# Altium PCB S52多功能板.PcbDoc (part 4 of 5)
Units mm, origin at the board's own origin, x right, y up, seen from the top; angles counter-clockwise.
Board outline 152.4 x 101.6 mm, 2 copper layers (Top Layer, Bottom Layer); 136 components, 143 nets, 561 pads, 46 vias.
Unrouted connection lines stored in the file: 1.
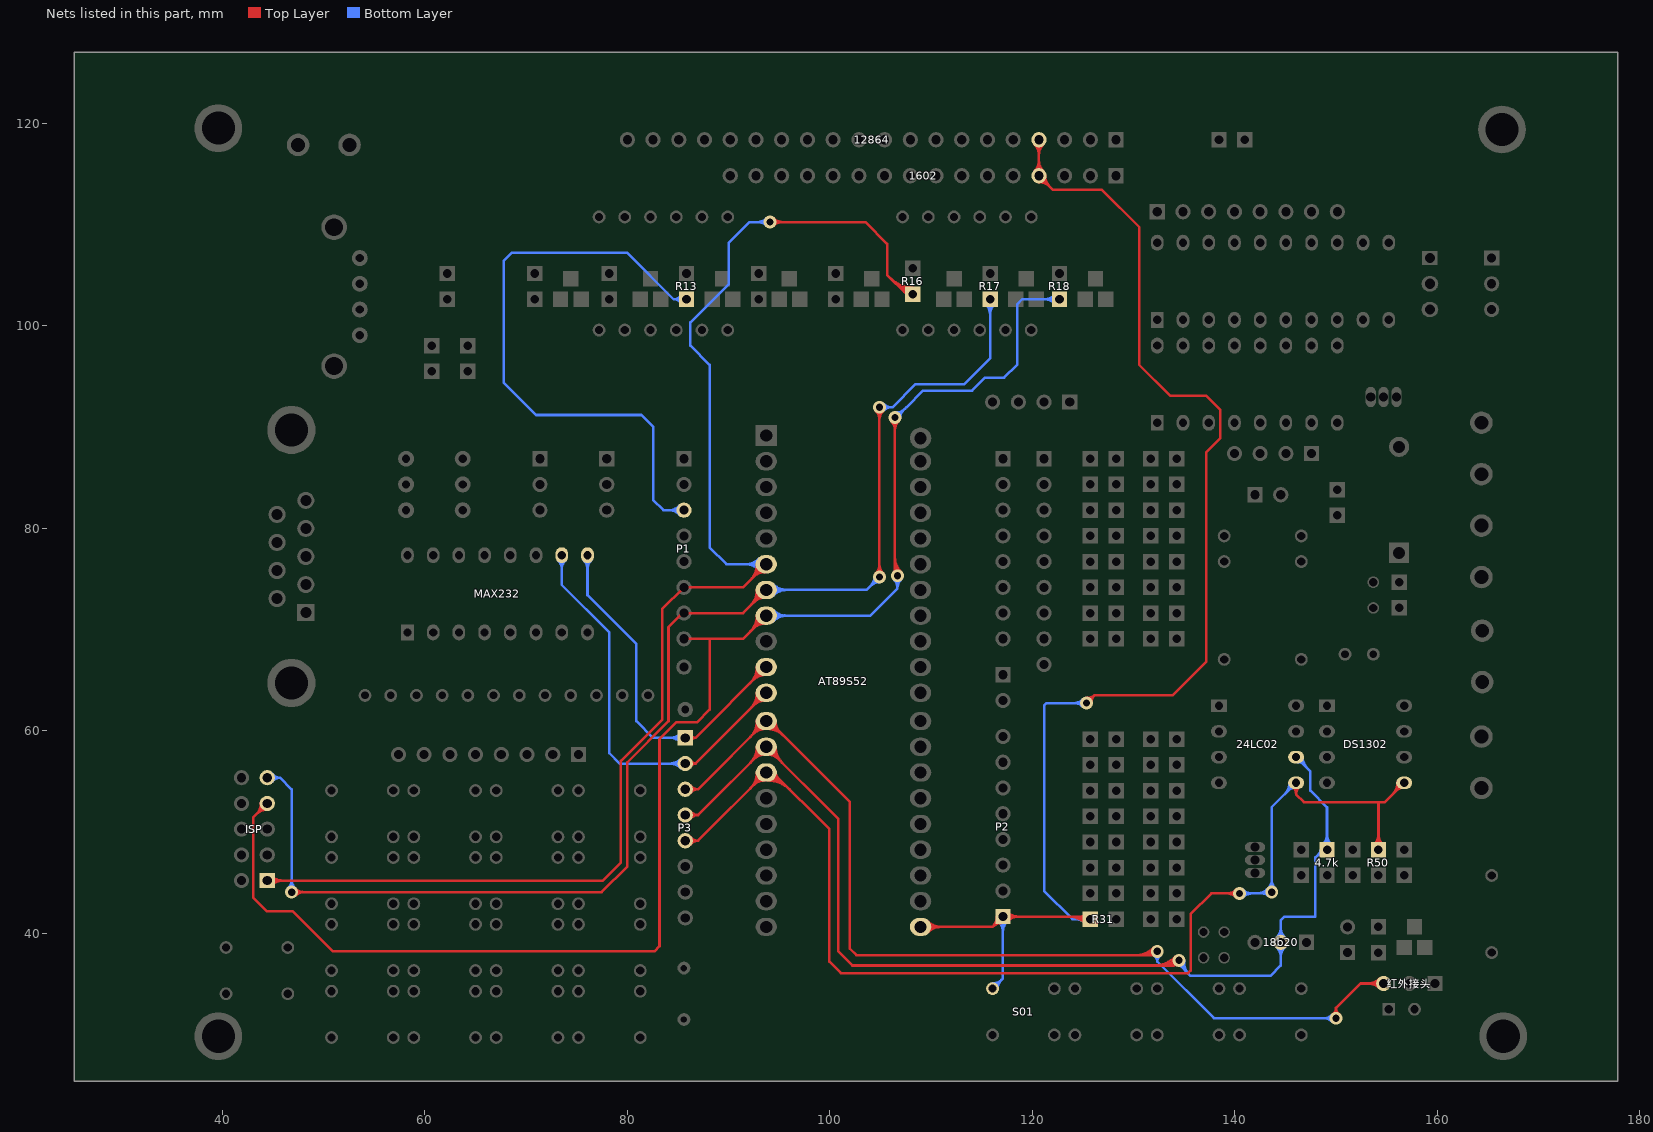
[diagram p4: the nets of this part, all layers, seen from the top]

## Via types
v1: diameter 1.27, hole 0.711, Top Layer to Bottom Layer, 46 vias

## Nets (pads, with @x,y where several pads share a name; then routed paths per layer and width w, separated by ;. In a path a pad name is that pad's centre, name@x,y a point inside that pad or via, vN(x,y) a via of type N, cw(c..) or ccw(c..) an arc to the next point about the centre after c; other vN are vias at no path point) (continued)
P10: AT89S52.1 P1.1 R11.1 | length 55.1
  Top Layer w0.254: P1.1@85.598,86.868 91.437,86.868 AT89S52.1@93.722,89.153 ; P1.1@85.859,86.607 cw(c86.489,85.977) 86.489,86.868 cw(c86.489,87.759) P1.1@85.859,87.129 ; P1.1@86.039,86.427 cw(c87.102,85.364) 87.102,86.868 cw(c87.102,88.372) P1.1@86.039,87.309 ; AT89S52.1@92.797,89.153 cw(c90.563,89.153) 92.142,87.573 cw(c93.722,85.993) AT89S52.1@93.722,88.228 ; AT89S52.1@93.051,89.153 cw(c91.43,89.153) 92.576,88.007 cw(c93.722,86.861) AT89S52.1@93.722,88.482
  Bottom Layer w0.254: R11.1@70.295,102.338 ccw(c69.85,102.121) 69.85,102.616 ; R11.1@70.295,102.894 cw(c69.85,103.111) 69.85,102.616 ; R11.1@70.866,102.616 69.85,102.616 ; P1.1@85.157,87.309 ccw(c84.094,88.372) 85.598,88.372 ccw(c87.102,88.372) P1.1@86.039,87.309 ; P1.1@85.337,87.129 ccw(c84.707,87.759) 85.598,87.759 ccw(c86.489,87.759) P1.1@85.859,87.129 ; P1.1@85.598,86.868 85.598,91.186 83.566,93.218 70.739,93.218 69.215,94.742 69.215,101.981 69.85,102.616
P10: 
P11: AT89S52.2 P1.2 R12.1 | length 73.9
  Top Layer w0.254: P1.2@85.598,84.328 91.437,84.328 AT89S52.2@93.722,86.613 ; P1.2@85.859,84.067 cw(c86.489,83.437) 86.489,84.328 cw(c86.489,85.219) P1.2@85.859,84.589 ; P1.2@86.039,83.887 cw(c87.102,82.824) 87.102,84.328 cw(c87.102,85.832) P1.2@86.039,84.769 ; 92.142,85.033 ccw(c90.563,86.613) AT89S52.2@92.797,86.613 ; 92.505,85.395 cw(c93.572,84.328) AT89S52.2@93.572,85.838 ; 92.576,85.467 ccw(c91.43,86.613) AT89S52.2@93.051,86.613 ; 92.938,85.829 cw(c93.572,85.195) AT89S52.2@93.572,86.092 ; 93.01,85.9 ccw(c92.297,86.613) AT89S52.2@93.305,86.613
  Bottom Layer w0.254: R12.1@77.783,102.167 ccw(c76.699,101.083) 76.699,102.616 ccw(c76.699,104.149) R12.1@77.783,103.065 ; R12.1@77.963,102.347 ccw(c77.312,101.696) 77.312,102.616 ccw(c77.312,103.536) R12.1@77.963,102.885 ; R12.1@78.232,102.616 75.946,102.616 72.009,106.553 69.342,106.553 68.453,105.664 68.453,94.615 70.739,92.329 81.788,92.329 83.439,90.678 83.439,84.709 83.82,84.328 P1.2@85.598,84.328 ; P1.2@85.157,83.887 ccw(c84.094,82.824) 84.094,84.328 ccw(c84.094,85.832) P1.2@85.157,84.769 ; P1.2@85.337,84.067 ccw(c84.707,83.437) 84.707,84.328 ccw(c84.707,85.219) P1.2@85.337,84.589
P11: 
P12: AT89S52.3 | length 14.8
  Top Layer w0.254: 85.598,81.788 91.437,81.788 AT89S52.3@93.722,84.073 ; 92.142,82.493 ccw(c90.563,84.073) AT89S52.3@92.797,84.073 ; 92.505,82.855 cw(c93.572,81.788) AT89S52.3@93.572,83.298 ; 92.576,82.927 ccw(c91.43,84.073) AT89S52.3@93.051,84.073 ; 92.938,83.289 cw(c93.572,82.655) AT89S52.3@93.572,83.552 ; 93.01,83.36 ccw(c92.297,84.073) AT89S52.3@93.305,84.073
P12: P1.3 R13.1 | length 65.1
  Bottom Layer w0.254: P1.3@85.157,81.347 ccw(c84.094,80.284) 84.094,81.788 ccw(c84.094,83.292) P1.3@85.157,82.229 ; P1.3@85.337,81.527 ccw(c84.707,80.897) 84.707,81.788 ccw(c84.707,82.679) P1.3@85.337,82.049 ; R13.1@85.344,102.235 ccw(c84.582,101.664) 84.582,102.616 ; R13.1@85.344,102.997 cw(c84.582,103.568) 84.582,102.616 ; P1.3@85.598,81.788 83.566,81.788 82.55,82.804 82.55,90.043 81.407,91.186 70.993,91.186 67.818,94.361 67.818,106.426 68.58,107.188 80.01,107.188 84.582,102.616 ; R13.1@85.852,102.616 84.582,102.616
P13: AT89S52.4 P1.4 R14.1 | length 104.3
  Top Layer w0.254: P1.4@85.598,79.248 91.437,79.248 AT89S52.4@93.722,81.533 ; P1.4@85.859,78.987 cw(c86.489,78.357) 86.489,79.248 cw(c86.489,80.139) P1.4@85.859,79.509 ; P1.4@86.039,78.807 cw(c87.102,77.744) 87.102,79.248 cw(c87.102,80.752) P1.4@86.039,79.689 ; v1@88.392,107.442 cw(c88.392,104.989) 90.126,106.724 ; v1@88.392,107.696 cw(c88.392,105.856) 89.693,107.157 ; 89.259,107.591 ccw(c88.392,106.724) v1(88.392,107.95) 88.9,107.95 91.44,105.41 91.44,104.267 92.964,102.743 R14.1@92.964,102.616 ; 91.79,103.917 cw(c90.489,102.616) R14.1@92.329,102.616 ; 92.097,103.61 ccw(c92.964,104.477) R14.1@92.964,103.251 ; 92.142,79.953 ccw(c90.563,81.533) AT89S52.4@92.797,81.533 ; 92.224,103.483 cw(c91.357,102.616) R14.1@92.583,102.616 ; 92.505,80.315 cw(c93.572,79.248) AT89S52.4@93.572,80.758 ; 92.576,80.387 ccw(c91.43,81.533) AT89S52.4@93.051,81.533 ; 92.938,80.749 cw(c93.572,80.115) AT89S52.4@93.572,81.012 ; 93.01,80.82 ccw(c92.297,81.533) AT89S52.4@93.305,81.533
  Bottom Layer w0.254: P1.4@85.157,78.807 ccw(c84.094,77.744) 84.094,79.248 ccw(c84.094,80.752) P1.4@85.157,79.689 ; P1.4@85.337,78.987 ccw(c84.707,78.357) 84.707,79.248 ccw(c84.707,80.139) P1.4@85.337,79.509 ; P1.4@85.598,79.248 83.312,79.248 81.788,80.772 81.788,89.027 81.026,89.789 71.247,89.789 67.056,93.98 67.056,106.934 67.945,107.823 v1@88.265,107.823 ; 86.859,107.823 ccw(c86.859,109.483) v1@88.033,108.309 ; v1@88.033,107.591 ccw(c87.472,107.03) 87.472,107.823 ccw(c87.472,108.87) v1@88.212,108.13
P13: 
P14: AT89S52.5 P1.5 R15.1 | length 79.3
  Top Layer w0.254: P1.5@85.598,76.708 91.437,76.708 AT89S52.5@93.722,78.993 ; P1.5@85.859,76.447 cw(c86.489,75.817) 86.489,76.708 cw(c86.489,77.599) P1.5@85.859,76.969 ; P1.5@86.039,76.267 cw(c87.102,75.204) 87.102,76.708 cw(c87.102,78.212) P1.5@86.039,77.149 ; 92.142,77.413 ccw(c90.563,78.993) AT89S52.5@92.797,78.993 ; v1(92.202,108.712) 96.266,108.712 97.536,107.442 97.536,105.664 R15.1@100.584,102.616 ; 92.505,77.775 cw(c93.572,76.708) AT89S52.5@93.572,78.218 ; v1@92.561,108.353 cw(c93.428,107.486) 93.428,108.712 cw(c93.428,109.938) v1@92.561,109.071 ; 92.576,77.847 ccw(c91.43,78.993) AT89S52.5@93.051,78.993 ; 92.938,78.209 cw(c93.572,77.575) AT89S52.5@93.572,78.472 ; 93.01,78.28 ccw(c92.297,78.993) AT89S52.5@93.305,78.993 ; R15.1@99.949,102.616 ccw(c98.416,102.616) 99.5,103.7 ccw(c100.584,104.784) R15.1@100.584,103.251 ; R15.1@100.203,102.616 ccw(c99.283,102.616) 99.934,103.266 ccw(c100.584,103.917) R15.1@100.584,102.997
  Bottom Layer w0.254: 90.96,107.978 cw(c92.123,106.816) v1@92.191,108.458 ; 91.369,108.387 cw(c92.155,107.601) v1(92.202,108.712) 91.694,108.712 90.805,107.823 90.805,103.759 88.646,101.6 88.646,80.264 89.917,78.993 AT89S52.5@93.722,78.993 ; AT89S52.5@93.024,78.445 ccw(c91.7,77.121) 91.7,78.993 ccw(c91.7,80.865) AT89S52.5@93.024,79.541 ; AT89S52.5@93.204,78.624 ccw(c92.313,77.734) 92.313,78.993 ccw(c92.313,80.252) AT89S52.5@93.204,79.362
P14: 
P15: AT89S52.6 ISP.1 R16.1 | length 161.9
  Top Layer w0.254: ISP.1@44.45,45.212 77.597,45.212 79.375,46.99 79.375,57.023 83.439,61.087 83.439,72.009 85.598,74.168 91.437,74.168 AT89S52.6@93.722,76.453 ; ISP.1@44.711,44.951 cw(c45.341,44.321) 45.341,45.212 cw(c45.341,46.103) ISP.1@44.711,45.473 ; ISP.1@44.891,44.771 cw(c45.954,43.708) 45.954,45.212 cw(c45.954,46.716) ISP.1@44.891,45.653 ; 92.142,74.873 ccw(c90.563,76.453) AT89S52.6@92.797,76.453 ; 92.505,75.235 cw(c93.572,74.168) AT89S52.6@93.572,75.678 ; 92.576,75.307 ccw(c91.43,76.453) AT89S52.6@93.051,76.453 ; 92.938,75.669 cw(c93.572,75.035) AT89S52.6@93.572,75.932 ; 93.01,75.74 ccw(c92.297,76.453) AT89S52.6@93.305,76.453 ; v1(94.107,110.236) 103.505,110.236 105.664,108.077 105.664,105.029 107.569,103.124 R16.1@108.204,103.124 ; v1@94.466,109.877 cw(c95.333,109.01) 95.333,110.236 cw(c95.333,111.462) v1@94.466,110.595 ; 106.036,104.657 ccw(c108.204,106.825) R16.1@108.204,103.759 ; 106.47,104.223 ccw(c108.204,105.958) R16.1@108.204,103.505 ; 106.903,103.79 ccw(c108.204,105.091) R16.1@108.204,103.251 ; 107.337,103.356 ccw(c108.204,104.223) R16.1@108.204,102.997
  Bottom Layer w0.254: AT89S52.6@93.024,75.905 ccw(c91.7,74.581) 91.7,76.453 ccw(c91.7,78.325) AT89S52.6@93.024,77.001 ; AT89S52.6@93.204,76.084 ccw(c92.313,75.194) 92.313,76.453 ccw(c92.313,77.712) AT89S52.6@93.204,76.822 ; AT89S52.6@93.722,76.453 89.79,76.453 88.138,78.105 88.138,96.139 86.233,98.044 86.233,100.33 90.043,104.14 90.043,108.204 92.075,110.236 v1(94.107,110.236) ; v1@93.748,109.877 ccw(c92.881,109.01) 92.881,110.236 ccw(c92.881,111.462) v1@93.748,110.595
P16: AT89S52.7 ISP.9 R17.1 | length 159.9
  Top Layer w0.254: v1(46.863,44.069) 77.47,44.069 80.01,46.609 80.01,56.896 84.074,60.96 84.074,70.231 85.471,71.628 91.437,71.628 AT89S52.7@93.722,73.913 ; v1@47.222,43.71 cw(c48.089,42.843) 48.089,44.069 cw(c48.089,45.295) v1@47.222,44.428 ; 92.142,72.333 ccw(c90.563,73.913) AT89S52.7@92.797,73.913 ; 92.505,72.695 cw(c93.572,71.628) AT89S52.7@93.572,73.138 ; 92.576,72.767 ccw(c91.43,73.913) AT89S52.7@93.051,73.913 ; 92.938,73.129 cw(c93.572,72.495) AT89S52.7@93.572,73.392 ; 93.01,73.2 ccw(c92.297,73.913) AT89S52.7@93.305,73.913 ; v1@104.543,75.543 ccw(c103.676,76.41) 104.902,76.41 ccw(c106.128,76.41) v1@105.261,75.543 ; v1@104.543,91.589 cw(c103.676,90.722) 104.902,90.722 cw(c106.128,90.722) v1@105.261,91.589 ; v1(104.902,75.184) v1(104.902,91.948)
  Bottom Layer w0.254: ISP.9@44.45,55.372 45.72,55.372 ; ISP.9@44.742,55.146 cw(c45.202,54.79) 45.202,55.372 cw(c45.202,55.954) ISP.9@44.742,55.598 ; ISP.9@44.943,54.991 cw(c45.72,54.389) 45.72,55.372 ; ISP.9@44.943,55.753 ccw(c45.72,56.355) 45.72,55.372 ; v1@46.504,44.428 ccw(c45.637,45.295) 46.863,45.295 ccw(c48.089,45.295) v1@47.222,44.428 ; v1(46.863,44.069) 46.863,54.229 45.72,55.372 ; AT89S52.7@93.722,73.913 103.631,73.913 v1(104.902,75.184) ; AT89S52.7@94.241,73.544 cw(c95.131,72.654) 95.131,73.913 cw(c95.131,75.172) AT89S52.7@94.241,74.282 ; AT89S52.7@94.42,73.365 cw(c95.744,72.041) 95.744,73.913 cw(c95.744,75.785) AT89S52.7@94.42,74.461 ; v1@104.394,75.184 cw(c103.168,75.184) 104.035,74.317 cw(c104.902,73.45) v1@104.902,74.676 ; v1(104.902,91.948) 106.172,91.948 108.458,94.234 113.284,94.234 115.824,96.774 R17.1@115.824,102.616 ; v1@105.261,91.589 cw(c106.128,90.722) 106.128,91.948 cw(c106.128,93.174) v1@105.261,92.307 ; R17.1@115.375,102.167 cw(c114.291,101.083) 115.824,101.083 cw(c117.357,101.083) R17.1@116.273,102.167 ; R17.1@115.555,102.347 cw(c114.904,101.696) 115.824,101.696 cw(c116.744,101.696) R17.1@116.093,102.347
P17: AT89S52.8 ISP.7 R18.1 | length 178.9
  Top Layer w0.254: ISP.7@43.827,52.832 cw(c42.323,52.832) 43.386,51.768 cw(c44.45,50.705) ISP.7@44.45,52.209 ; ISP.7@44.081,52.832 cw(c43.19,52.832) 43.82,52.202 cw(c44.45,51.572) ISP.7@44.45,52.463 ; ISP.7@44.45,52.832 43.053,51.435 43.053,43.561 44.45,42.164 46.99,42.164 50.927,38.227 82.677,38.227 83.185,38.735 83.185,59.182 84.836,60.833 86.868,60.833 88.138,62.103 88.138,69.088 ; 85.598,69.088 91.437,69.088 AT89S52.8@93.722,71.373 ; 92.142,69.793 ccw(c90.563,71.373) AT89S52.8@92.797,71.373 ; 92.505,70.155 cw(c93.572,69.088) AT89S52.8@93.572,70.598 ; 92.576,70.227 ccw(c91.43,71.373) AT89S52.8@93.051,71.373 ; 92.938,70.589 cw(c93.572,69.955) AT89S52.8@93.572,70.852 ; 93.01,70.66 ccw(c92.297,71.373) AT89S52.8@93.305,71.373 ; v1@106.067,90.573 cw(c105.2,89.706) 106.426,89.706 cw(c107.652,89.706) v1@106.785,90.573 ; v1@106.321,75.67 ccw(c106.067,75.924) 106.426,75.924 ccw(c107.293,75.924) v1(106.68,75.311) 106.426,75.565 v1(106.426,90.932) ; 106.426,76.537 ccw(c107.906,76.537) v1@106.86,75.491 ; 106.426,77.151 ccw(c108.52,77.151) v1@107.039,75.67
  Bottom Layer w0.254: AT89S52.8@93.722,71.373 104.012,71.373 106.68,74.041 v1(106.68,75.311) ; AT89S52.8@94.241,71.004 cw(c95.131,70.114) 95.131,71.373 cw(c95.131,72.632) AT89S52.8@94.241,71.742 ; AT89S52.8@94.42,70.825 cw(c95.744,69.501) 95.744,71.373 cw(c95.744,73.245) AT89S52.8@94.42,71.921 ; v1@106.321,74.952 cw(c105.454,74.085) 106.68,74.085 cw(c107.906,74.085) v1@107.039,74.952 ; v1(106.426,90.932) 106.553,90.932 107.442,91.821 cw(c106.517,92.746) v1@106.451,91.439 ; v1@106.439,91.186 ccw(c106.478,91.975) 107.037,91.416 ; v1@106.934,90.932 cw(c107.854,90.932) 107.203,91.582 ; 107.569,91.948 109.22,93.599 114.046,93.599 115.316,94.869 117.221,94.869 118.491,96.139 118.491,102.108 118.999,102.616 R18.1@122.682,102.616 ; R18.1@122.233,102.167 ccw(c121.149,101.083) 121.149,102.616 ccw(c121.149,104.149) R18.1@122.233,103.065 ; R18.1@122.413,102.347 ccw(c121.762,101.696) 121.762,102.616 ccw(c121.762,103.536) R18.1@122.413,102.885
P20: 1602.4 12864.4 AT89S52.21 P2.1 R31.1 S01.1 | length 172.3
  Top Layer w0.254: AT89S52.21@108.966,40.64 116.078,40.64 ; AT89S52.21@109.485,40.271 cw(c110.375,39.381) 110.375,40.64 cw(c110.375,41.899) AT89S52.21@109.485,41.009 ; AT89S52.21@109.664,40.092 cw(c110.988,38.768) 110.988,40.64 cw(c110.988,42.512) AT89S52.21@109.664,41.188 ; P2.1@116.471,41.636 cw(c115.127,41.591) 116.078,40.64 ; P2.1@116.725,41.644 cw(c115.929,41.618) 116.492,41.054 cw(c117.056,40.491) P2.1@117.082,41.287 ; P2.1@117.074,41.033 ccw(c117.029,39.689) 116.078,40.64 ; P2.1@117.355,41.395 cw(c117.985,40.765) 117.985,41.656 cw(c117.985,42.547) P2.1@117.355,41.917 ; P2.1@117.535,41.215 cw(c118.598,40.152) 118.598,41.656 cw(c118.598,43.16) P2.1@117.535,42.097 ; 1602.4@120.209,115.249 ccw(c119.146,116.312) 120.65,116.312 ccw(c122.154,116.312) 1602.4@121.091,115.249 ; 12864.4@120.209,117.923 cw(c119.146,116.86) 120.65,116.86 cw(c122.154,116.86) 12864.4@121.091,117.923 ; 1602.4@120.389,115.069 ccw(c119.759,115.699) 120.65,115.699 ccw(c121.541,115.699) 1602.4@120.911,115.069 ; 12864.4@120.389,118.103 cw(c119.759,117.473) 120.65,117.473 cw(c121.541,117.473) 12864.4@120.911,118.103 ; 1602.4@120.65,114.185 cw(c120.65,112.681) 121.714,113.744 cw(c122.777,114.808) 1602.4@121.273,114.808 ; 1602.4@120.65,114.439 cw(c120.65,113.548) 121.28,114.178 cw(c121.91,114.808) 1602.4@121.019,114.808 ; 12864.4@120.65,118.364 1602.4@120.65,114.808 122.047,113.411 126.873,113.411 130.556,109.728 130.556,96.139 133.604,93.091 137.16,93.091 138.557,91.694 138.557,88.9 137.16,87.503 137.16,66.802 133.858,63.5 126.111,63.5 ; 123.584,41.656 cw(c123.584,39.256) R31.1@125.281,40.953 ; 124.197,41.656 cw(c124.197,39.869) R31.1@125.461,41.133 ; R31.1@125.281,41.851 cw(c124.81,42.322) 124.81,41.656 cw(c124.81,40.482) R31.1@125.64,41.312 ; v1(125.349,62.738) 126.111,63.5 ; v1@125.398,63.244 ccw(c125.482,64.129) 126.111,63.5 ; R31.1@125.73,41.402 125.476,41.656 P2.1@117.094,41.656 116.078,40.64 ; v1@125.855,62.787 cw(c126.74,62.871) 126.111,63.5
  Bottom Layer w0.254: S01.1@116.078,34.544 117.094,35.56 P2.1@117.094,41.656 ; S01.1@116.078,35.052 ccw(c116.078,36.278) 116.945,35.411 ccw(c117.812,34.544) S01.1@116.586,34.544 ; P2.1@116.653,41.215 cw(c115.59,40.152) 117.094,40.152 cw(c118.598,40.152) P2.1@117.535,41.215 ; P2.1@116.833,41.395 cw(c116.203,40.765) 117.094,40.765 cw(c117.985,40.765) P2.1@117.355,41.395 ; v1@124.99,62.379 ccw(c124.123,61.512) 124.123,62.738 ccw(c124.123,63.964) v1@124.99,63.097 ; R31.1@125.281,40.953 ccw(c124.197,39.869) 124.197,41.402 ccw(c124.197,42.935) R31.1@125.281,41.851 ; v1(125.349,62.738) 121.412,62.738 121.158,62.484 121.158,44.196 123.952,41.402 R31.1@125.73,41.402 ; R31.1@125.461,41.133 ccw(c124.81,40.482) 124.81,41.402 ccw(c124.81,42.322) R31.1@125.461,41.671
P21: 1602.5 12864.5 AT89S52.22 P2.2 R32.1 S02.1 | length 180.9
  Top Layer w0.254: AT89S52.22@108.966,43.18 116.078,43.18 ; AT89S52.22@109.485,42.811 cw(c110.375,41.921) 110.375,43.18 cw(c110.375,44.439) AT89S52.22@109.485,43.549 ; AT89S52.22@109.664,42.632 cw(c110.988,41.308) 110.988,43.18 cw(c110.988,45.052) AT89S52.22@109.664,43.728 ; P2.2@116.471,44.176 cw(c115.127,44.131) 116.078,43.18 ; P2.2@116.725,44.184 cw(c115.929,44.158) 116.492,43.594 cw(c117.056,43.031) P2.2@117.082,43.827 ; P2.2@117.074,43.573 ccw(c117.029,42.229) 116.078,43.18 ; P2.2@117.355,43.935 cw(c117.985,43.305) 117.985,44.196 cw(c117.985,45.087) P2.2@117.355,44.457 ; P2.2@117.535,43.755 cw(c118.598,42.692) 118.598,44.196 cw(c118.598,45.7) P2.2@117.535,44.637 ; 1602.5@117.669,115.249 ccw(c116.606,116.312) 118.11,116.312 ccw(c119.614,116.312) 1602.5@118.551,115.249 ; 12864.5@117.669,117.923 cw(c116.606,116.86) 118.11,116.86 cw(c119.614,116.86) 12864.5@118.551,117.923 ; 1602.5@117.827,114.253 cw(c117.593,113.792) 118.11,113.792 ; 1602.5@117.849,115.069 ccw(c117.219,115.699) 118.11,115.699 ccw(c119.001,115.699) 1602.5@118.371,115.069 ; 12864.5@117.849,118.103 cw(c117.219,117.473) 118.11,117.473 cw(c119.001,117.473) 12864.5@118.371,118.103 ; 12864.5@118.11,118.364 118.11,113.792 ; 1602.5@118.393,114.253 ccw(c118.627,113.792) 118.11,113.792 ; v1@122.45,61.573 ccw(c121.583,62.44) 122.809,62.44 ccw(c124.035,62.44) v1@123.168,61.573 ; v1(122.809,61.214) 122.809,63.119 123.825,64.135 133.477,64.135 136.398,67.056 136.398,90.678 135.128,91.948 130.429,91.948 129.921,92.456 129.921,109.601 126.619,112.903 118.999,112.903 118.11,113.792 ; 123.584,44.196 cw(c123.584,41.796) R32.1@125.281,43.493 ; 124.197,44.196 cw(c124.197,42.409) R32.1@125.461,43.673 ; R32.1@125.281,44.391 cw(c124.81,44.862) 124.81,44.196 cw(c124.81,43.022) R32.1@125.64,43.852 ; R32.1@125.857,43.942 R32.1@125.73,43.942 125.476,44.196 P2.2@117.094,44.196 116.078,43.18
  Bottom Layer w0.254: P2.2@117.094,43.573 cw(c117.094,40.229) 119.458,42.594 ; P2.2@117.094,43.827 cw(c117.094,41.097) 119.025,43.027 ; P2.2@117.094,44.081 cw(c117.094,41.964) 118.591,43.461 ; P2.2@117.094,44.196 117.856,44.196 ; P2.2@117.094,44.335 cw(c117.094,42.831) 118.158,43.894 ; P2.2@117.705,44.072 cw(c117.856,44.042) 117.856,44.196 ; P2.2@117.705,44.32 ccw(c117.856,44.35) 117.856,44.196 ; v1@122.45,60.855 cw(c121.583,59.988) 122.809,59.988 cw(c124.035,59.988) v1@123.168,60.855 ; v1(122.809,61.214) 122.809,44.196 122.936,44.069 125.603,44.069 R32.1@125.73,43.942 ; S02.1@123.698,34.544 cw(c122.472,34.544) 123.339,33.677 cw(c124.206,32.81) S02.1@124.206,34.036 ; 123.89,44.069 cw(c123.89,42.102) R32.1@125.281,43.493 ; S02.1@124.206,34.544 122.428,32.766 121.158,32.766 119.761,34.163 119.761,42.291 117.856,44.196 ; R32.1@125.281,44.391 cw(c124.504,45.168) 124.504,44.069 cw(c124.504,42.716) R32.1@125.461,43.673
P21: 
P22: 1602.6 12864.6 AT89S52.23 P2.3 R33.1 S03.1 | length 186.7
  Top Layer w0.254: AT89S52.23@108.966,45.72 116.078,45.72 ; AT89S52.23@109.485,45.351 cw(c110.375,44.461) 110.375,45.72 cw(c110.375,46.979) AT89S52.23@109.485,46.089 ; AT89S52.23@109.664,45.172 cw(c110.988,43.848) 110.988,45.72 cw(c110.988,47.592) AT89S52.23@109.664,46.268 ; 1602.6@115.129,115.249 ccw(c114.066,116.312) 115.57,116.312 ccw(c117.074,116.312) 1602.6@116.011,115.249 ; 12864.6@115.129,117.923 cw(c114.066,116.86) 115.57,116.86 cw(c117.074,116.86) 12864.6@116.011,117.923 ; 1602.6@115.309,115.069 ccw(c114.679,115.699) 115.57,115.699 ccw(c116.461,115.699) 1602.6@115.831,115.069 ; 12864.6@115.309,118.103 cw(c114.679,117.473) 115.57,117.473 cw(c116.461,117.473) 12864.6@115.831,118.103 ; 1602.6@115.431,114.811 ccw(c116.577,114.787) 115.767,113.976 ; 12864.6@115.57,118.364 115.57,114.173 117.348,112.395 126.365,112.395 126.365,112.268 129.286,109.347 129.286,90.043 130.302,89.027 134.62,89.027 135.89,87.757 135.89,67.31 133.35,64.77 122.047,64.77 v1(119.761,62.484) ; 1602.6@115.685,114.806 ccw(c117.403,114.77) 116.188,113.555 ; 1602.6@115.939,114.8 ccw(c118.228,114.753) 116.609,113.134 ; 1602.6@116.193,114.795 ccw(c119.054,114.736) 117.03,112.713 ; P2.3@116.471,46.716 cw(c115.127,46.671) 116.078,45.72 ; P2.3@116.725,46.724 cw(c115.929,46.698) 116.492,46.134 cw(c117.056,45.571) P2.3@117.082,46.367 ; P2.3@117.074,46.113 ccw(c117.029,44.769) 116.078,45.72 ; P2.3@117.355,46.475 cw(c117.985,45.845) 117.985,46.736 cw(c117.985,47.627) P2.3@117.355,46.997 ; P2.3@117.535,46.295 cw(c118.598,45.232) 118.598,46.736 cw(c118.598,48.24) P2.3@117.535,47.177 ; v1@119.761,62.992 ccw(c119.761,64.218) 120.628,63.351 ccw(c121.495,62.484) v1@120.269,62.484 ; 123.584,46.736 cw(c123.584,44.336) R33.1@125.281,46.033 ; 124.197,46.736 cw(c124.197,44.949) R33.1@125.461,46.213 ; R33.1@125.281,46.931 cw(c124.81,47.402) 124.81,46.736 cw(c124.81,45.562) R33.1@125.64,46.392 ; R33.1@125.73,46.482 125.476,46.736 P2.3@117.094,46.736 116.078,45.72
  Bottom Layer w0.254: P2.3@117.094,46.736 119.634,46.736 119.761,46.863 ; P2.3@117.355,46.475 cw(c117.985,45.845) 117.985,46.736 cw(c117.985,47.627) P2.3@117.355,46.997 ; P2.3@117.535,46.295 cw(c118.598,45.232) 118.598,46.736 cw(c118.598,48.24) P2.3@117.535,47.177 ; v1@119.402,62.125 cw(c118.535,61.258) 119.761,61.258 cw(c120.987,61.258) v1@120.12,62.125 ; v1(119.761,62.484) 119.761,44.45 121.158,43.053 121.158,37.211 122.301,36.068 128.651,36.068 129.159,35.56 129.159,33.655 129.667,33.147 132.08,33.147 132.334,33.401 ; S03.1@131.994,34.167 cw(c131.302,33.401) 132.334,33.401 ; S03.1@132.334,34.544 132.334,33.401 ; S03.1@132.674,34.167 ccw(c133.366,33.401) 132.334,33.401
P22: 
P23: 12864.15 AT89S52.24 P2.4 R34.1 S04.1 | length 219.2
  Top Layer w0.254: AT89S52.24@108.966,48.26 116.078,48.26 ; AT89S52.24@109.485,47.891 cw(c110.375,47.001) 110.375,48.26 cw(c110.375,49.519) AT89S52.24@109.485,48.629 ; AT89S52.24@109.664,47.712 cw(c110.988,46.388) 110.988,48.26 cw(c110.988,50.132) AT89S52.24@109.664,48.808 ; P2.4@116.471,49.256 cw(c115.127,49.211) 116.078,48.26 ; P2.4@116.725,49.264 cw(c115.929,49.238) 116.492,48.674 cw(c117.056,48.111) P2.4@117.082,48.907 ; P2.4@117.074,48.653 ccw(c117.029,47.309) 116.078,48.26 ; P2.4@117.355,49.015 cw(c117.985,48.385) 117.985,49.276 cw(c117.985,50.167) P2.4@117.355,49.537 ; P2.4@117.535,48.835 cw(c118.598,47.772) 118.598,49.276 cw(c118.598,50.78) P2.4@117.535,49.717 ; 123.584,49.276 cw(c123.584,46.876) R34.1@125.281,48.573 ; 124.197,49.276 cw(c124.197,47.489) R34.1@125.461,48.753 ; R34.1@125.281,49.471 cw(c124.81,49.942) 124.81,49.276 cw(c124.81,48.102) R34.1@125.64,48.932 ; R34.1@125.73,49.022 125.476,49.276 P2.4@117.094,49.276 116.078,48.26 ; v1@134.62,94.615 cw(c134.62,94.002) 135.054,94.435 ; v1(134.62,95.123) 134.62,94.869 135.636,93.853 145.415,93.853 v1(146.323,92.945) ; v1@134.873,95.096 ccw(c135.777,94.998) 135.134,94.355 ; v1@135.125,95.069 ccw(c136.454,94.925) 135.509,93.98 ; v1@145.815,92.945 ccw(c144.589,92.945) 145.456,93.812 ccw(c146.323,94.679) v1@146.323,93.453
  Bottom Layer w0.254: 12864.15@92.427,118.919 ccw(c92.193,119.38) 92.71,119.38 ; 12864.15@92.71,118.364 92.71,119.38 ; 12864.15@92.993,118.919 cw(c93.227,119.38) 92.71,119.38 ; R34.1@125.73,49.657 ccw(c125.73,51.497) 127.031,50.196 ; R34.1@125.768,48.901 cw(c126.049,47.992) 126.722,48.665 ; R34.1@125.843,48.658 cw(c126.19,47.538) 127.02,48.367 ; R34.1@125.857,49.022 127.127,50.292 136.017,50.292 136.652,50.927 136.652,62.738 138.557,64.643 141.732,64.643 144.399,67.31 144.399,80.137 146.323,82.061 v1(146.323,92.945) ; 126.597,49.762 cw(c125.73,50.629) 125.73,49.403 R34.1@125.73,49.022 R34.1@126.365,49.022 ; 126.724,49.889 ccw(c127.591,49.022) R34.1@126.365,49.022 ; v1@134.261,94.764 ccw(c133.394,93.897) 133.394,95.123 ccw(c133.394,96.349) v1@134.261,95.482 ; v1(134.62,95.123) 131.064,95.123 130.175,96.012 130.175,119.253 129.54,119.888 129.54,120.015 93.345,120.015 92.71,119.38 ; 139.7,33.528 ccw(c139.003,34.225) S04.1@139.966,34.435 ; S04.1@140.214,34.49 cw(c139.542,34.343) 140.028,33.856 cw(c140.462,33.423) S04.1@140.462,34.036 ; S04.1@140.462,34.544 140.462,34.29 139.573,33.401 136.906,33.401 133.35,36.957 133.35,39.497 132.842,40.005 127.508,40.005 127,40.513 127,48.387 R34.1@126.365,49.022 ; v1@145.964,92.586 cw(c145.097,91.719) 146.323,91.719 cw(c147.549,91.719) v1@146.682,92.586
P23: 
P24: AT89S52.25 P2.5 R35.1 | length 34.2
  Top Layer w0.254: AT89S52.25@108.966,50.8 116.078,50.8 ; AT89S52.25@109.485,50.431 cw(c110.375,49.541) 110.375,50.8 cw(c110.375,52.059) AT89S52.25@109.485,51.169 ; AT89S52.25@109.664,50.252 cw(c110.988,48.928) 110.988,50.8 cw(c110.988,52.672) AT89S52.25@109.664,51.348 ; P2.5@116.471,51.796 cw(c115.127,51.751) 116.078,50.8 ; P2.5@116.725,51.804 cw(c115.929,51.778) 116.492,51.214 cw(c117.056,50.651) P2.5@117.082,51.447 ; P2.5@117.074,51.193 ccw(c117.029,49.849) 116.078,50.8 ; P2.5@117.355,51.555 cw(c117.985,50.925) 117.985,51.816 cw(c117.985,52.707) P2.5@117.355,52.077 ; P2.5@117.535,51.375 cw(c118.598,50.312) 118.598,51.816 cw(c118.598,53.32) P2.5@117.535,52.257 ; 123.584,51.816 cw(c123.584,49.416) R35.1@125.281,51.113 ; 124.197,51.816 cw(c124.197,50.029) R35.1@125.461,51.293 ; R35.1@125.281,52.011 cw(c124.81,52.482) 124.81,51.816 cw(c124.81,50.642) R35.1@125.64,51.472 ; R35.1@125.73,51.562 125.476,51.816 P2.5@117.094,51.816 116.078,50.8
P24: 
P25: 12864.17 AT89S52.26 DA0832.17 P2.6 R36.1 | length 179.5
  Top Layer w0.254: AT89S52.26@108.966,53.34 116.078,53.34 ; AT89S52.26@109.485,52.971 cw(c110.375,52.081) 110.375,53.34 cw(c110.375,54.599) AT89S52.26@109.485,53.709 ; AT89S52.26@109.664,52.792 cw(c110.988,51.468) 110.988,53.34 cw(c110.988,55.212) AT89S52.26@109.664,53.888 ; P2.6@116.471,54.336 cw(c115.127,54.291) 116.078,53.34 ; P2.6@116.725,54.344 cw(c115.929,54.318) 116.492,53.754 cw(c117.056,53.191) P2.6@117.082,53.987 ; P2.6@117.074,53.733 ccw(c117.029,52.389) 116.078,53.34 ; P2.6@117.355,54.095 cw(c117.985,53.465) 117.985,54.356 cw(c117.985,55.247) P2.6@117.355,54.617 ; P2.6@117.535,53.915 cw(c118.598,52.852) 118.598,54.356 cw(c118.598,55.86) P2.6@117.535,54.797 ; 123.584,54.356 cw(c123.584,51.956) R36.1@125.281,53.653 ; 124.197,54.356 cw(c124.197,52.569) R36.1@125.461,53.833 ; R36.1@125.281,54.551 cw(c124.81,55.022) 124.81,54.356 cw(c124.81,53.182) R36.1@125.64,54.012 ; R36.1@125.73,54.102 125.476,54.356 P2.6@117.094,54.356 116.078,53.34 ; v1@137.944,113.941 cw(c136.157,112.154) 138.684,112.154 ; v1@138.123,114.12 cw(c136.77,112.767) 138.684,112.767 ; 138.684,113.38 ccw(c137.383,113.38) v1(138.303,114.3) 138.684,113.919 138.684,109.471 DA0832.17@139.955,108.2 ; 138.828,109.328 ccw(c139.955,110.455) DA0832.17@139.955,108.861 ; 139.22,108.935 cw(c138.647,108.363) DA0832.17@139.457,108.363 ; 139.261,108.894 ccw(c139.955,109.588) DA0832.17@139.955,108.607
  Bottom Layer w0.254: 12864.17@87.347,118.919 ccw(c87.113,119.38) 87.63,119.38 ; 12864.17@87.63,118.364 87.63,119.38 ; 12864.17@87.913,118.919 cw(c88.147,119.38) 87.63,119.38 ; R36.1@125.73,54.102 125.73,54.61 126.619,55.499 ; R36.1@125.851,54.142 cw(c126.571,54.378) 126.035,54.915 ; R36.1@126.092,54.221 cw(c127.011,54.523) 126.327,55.207 ; R36.1@126.333,54.3 cw(c127.451,54.667) 126.619,55.499 ; 136.779,96.774 136.017,97.536 136.017,104.267 138.933,107.183 138.938,107.183 DA0832.17@139.955,108.2 ; v1@137.795,114.3 ccw(c136.569,114.3) 137.436,115.167 ccw(c138.303,116.034) v1@138.303,114.808 ; 137.922,96.774 141.224,93.472 141.224,86.233 137.414,82.423 137.414,66.04 132.927,61.553 132.927,55.795 132.63,55.499 126.619,55.499 ; v1(138.303,114.3) 131.572,121.031 89.281,121.031 87.63,119.38 ; 138.857,107.102 cw(c139.915,106.044) DA0832.17@139.945,107.54 ; 139.22,107.465 ccw(c138.647,108.038) DA0832.17@139.457,108.038 ; 139.278,107.524 cw(c139.931,106.871) DA0832.17@139.95,107.794
P25: 
P26: AT89S52.27 DA0832.1 P2.7 R37.1 | length 99.9
  Top Layer w0.254: AT89S52.27@108.966,55.88 116.078,55.88 ; AT89S52.27@109.485,55.511 cw(c110.375,54.621) 110.375,55.88 cw(c110.375,57.139) AT89S52.27@109.485,56.249 ; AT89S52.27@109.664,55.332 cw(c110.988,54.008) 110.988,55.88 cw(c110.988,57.752) AT89S52.27@109.664,56.428 ; P2.7@116.471,56.876 cw(c115.127,56.831) 116.078,55.88 ; P2.7@116.725,56.884 cw(c115.929,56.858) 116.492,56.294 cw(c117.056,55.731) P2.7@117.082,56.527 ; P2.7@117.074,56.273 ccw(c117.029,54.929) 116.078,55.88 ; P2.7@117.355,56.635 cw(c117.985,56.005) 117.985,56.896 cw(c117.985,57.787) P2.7@117.355,57.157 ; P2.7@117.535,56.455 cw(c118.598,55.392) 118.598,56.896 cw(c118.598,58.4) P2.7@117.535,57.337 ; 123.584,56.896 cw(c123.584,54.496) R37.1@125.281,56.193 ; 124.197,56.896 cw(c124.197,55.109) R37.1@125.461,56.373 ; R37.1@125.281,57.091 cw(c124.81,57.562) 124.81,56.896 cw(c124.81,55.722) R37.1@125.64,56.552 ; R37.1@125.73,56.642 125.476,56.896 P2.7@117.094,56.896 116.078,55.88 ; DA0832.1@132.335,99.92 cw(c132.335,97.705) 133.901,99.271 ; DA0832.1@132.335,100.174 cw(c132.335,98.573) 133.467,99.705 ; DA0832.1@132.335,100.428 cw(c132.335,99.44) 133.034,100.138 ; DA0832.1@132.335,100.58 132.592,100.58 133.858,99.314 135.763,99.314 136.271,98.806 136.271,96.774 v1(137.668,95.377) ; v1@137.16,95.377 ccw(c135.934,95.377) 136.801,96.244 ccw(c137.668,97.111) v1@137.668,95.885
  Bottom Layer w0.254: R37.1@125.73,56.642 125.73,56.769 127,58.039 129.413,58.039 129.54,58.166 129.54,60.706 136.906,68.072 136.906,87.884 138.557,89.535 138.557,94.488 v1@137.541,95.504 ; R37.1@125.73,57.277 ccw(c125.73,58.503) 126.597,57.636 ; R37.1@126.111,56.642 cw(c127.337,56.642) 126.47,57.509 ; R37.1@126.365,56.642 cw(c128.205,56.642) 126.904,57.943 ; v1@137.668,94.869 cw(c137.668,93.643) 138.535,94.51 cw(c139.402,95.377) v1@138.176,95.377
P26: 
P27: AT89S52.28 DA0832.2 DA0832.18 P2.8 R38.1 | length 99.8
  Top Layer w0.254: AT89S52.28@108.966,58.42 116.078,58.42 ; AT89S52.28@109.485,58.051 cw(c110.375,57.161) 110.375,58.42 cw(c110.375,59.679) AT89S52.28@109.485,58.789 ; AT89S52.28@109.664,57.872 cw(c110.988,56.548) 110.988,58.42 cw(c110.988,60.292) AT89S52.28@109.664,58.968 ; P2.8@116.471,59.416 cw(c115.127,59.371) 116.078,58.42 ; P2.8@116.725,59.424 cw(c115.929,59.398) 116.492,58.834 cw(c117.056,58.271) P2.8@117.082,59.067 ; P2.8@117.074,58.813 ccw(c117.029,57.469) 116.078,58.42 ; P2.8@117.355,59.175 cw(c117.985,58.545) 117.985,59.436 cw(c117.985,60.327) P2.8@117.355,59.697 ; P2.8@117.535,58.995 cw(c118.598,57.932) 118.598,59.436 cw(c118.598,60.94) P2.8@117.535,59.877 ; 123.584,59.436 cw(c123.584,57.036) R38.1@125.281,58.733 ; 124.197,59.436 cw(c124.197,57.649) R38.1@125.461,58.913 ; R38.1@125.281,59.631 cw(c124.81,60.102) 124.81,59.436 cw(c124.81,58.262) R38.1@125.64,59.092 ; R38.1@125.73,59.182 125.476,59.436 P2.8@117.094,59.436 116.078,58.42
  Bottom Layer w0.254: R38.1@125.395,59.721 ccw(c125.019,60.325) 125.73,60.325 ; R38.1@125.857,59.182 R38.1@125.73,59.182 125.73,60.325 ; R38.1@126.065,59.721 cw(c126.441,60.325) 125.73,60.325 ; 134.077,99.914 cw(c134.727,99.263) DA0832.2@134.844,100.176 ; 134.233,100.07 ccw(c133.885,100.418) DA0832.2@134.377,100.418 ; DA0832.2@134.523,101.095 ccw(c133.673,101.945) 134.875,101.945 ccw(c136.077,101.945) DA0832.2@135.227,101.095 ; DA0832.2@134.875,100.58 134.875,105.66 DA0832.18@137.415,108.2 ; DA0832.2@135.005,100.58 134.743,100.58 133.858,99.695 133.858,96.774 134.366,96.266 135.89,96.266 136.271,95.885 136.271,68.58 128.397,60.706 126.111,60.706 125.73,60.325 ; 136.288,107.073 cw(c137.415,105.945) DA0832.18@137.415,107.54 ; 136.68,107.465 ccw(c136.107,108.038) DA0832.18@136.917,108.038 ; 136.721,107.506 cw(c137.415,106.813) DA0832.18@137.415,107.794
P27: 
P30: AT89S52.10 MAX232.9 P3.1 | length 47.3
  Top Layer w0.254: P3.1@85.725,59.309 86.738,59.309 ; P3.1@86.281,59.028 cw(c86.738,58.797) 86.738,59.309 ; P3.1@86.281,59.59 ccw(c86.738,59.821) 86.738,59.309 ; 92.142,64.713 ccw(c90.563,66.293) AT89S52.10@92.797,66.293 ; 92.505,65.075 cw(c93.572,64.008) AT89S52.10@93.572,65.518 ; 92.576,65.147 ccw(c91.43,66.293) AT89S52.10@93.051,66.293 ; 92.938,65.509 cw(c93.572,64.875) AT89S52.10@93.572,65.772 ; 93.01,65.58 ccw(c92.297,66.293) AT89S52.10@93.305,66.293 ; AT89S52.10@93.722,66.293 86.738,59.309
  Bottom Layer w0.254: MAX232.9@75.722,76.825 cw(c74.872,75.975) 76.074,75.975 cw(c77.276,75.975) MAX232.9@76.426,76.825 ; MAX232.9@76.074,77.339 76.074,73.405 80.899,68.58 80.899,60.96 82.55,59.309 P3.1@85.725,59.309 ; P3.1@85.284,58.868 ccw(c84.221,57.805) 84.221,59.309 ccw(c84.221,60.813) P3.1@85.284,59.75 ; P3.1@85.464,59.048 ccw(c84.834,58.418) 84.834,59.309 ccw(c84.834,60.2) P3.1@85.464,59.57
P31: AT89S52.11 MAX232.10 P3.2 | length 52.8
  Top Layer w0.254: P3.2@85.725,56.769 86.738,56.769 ; P3.2@86.281,56.488 cw(c86.738,56.257) 86.738,56.769 ; P3.2@86.281,57.05 ccw(c86.738,57.281) 86.738,56.769 ; 92.142,62.173 ccw(c90.563,63.753) AT89S52.11@92.797,63.753 ; 92.505,62.535 cw(c93.572,61.468) AT89S52.11@93.572,62.978 ; 92.576,62.607 ccw(c91.43,63.753) AT89S52.11@93.051,63.753 ; 92.938,62.969 cw(c93.572,62.335) AT89S52.11@93.572,63.232 ; 93.01,63.04 ccw(c92.297,63.753) AT89S52.11@93.305,63.753 ; AT89S52.11@93.727,63.753 AT89S52.11@93.722,63.753 86.738,56.769
  Bottom Layer w0.254: MAX232.10@73.182,76.825 cw(c72.332,75.975) 73.534,75.975 cw(c74.736,75.975) MAX232.10@73.886,76.825 ; MAX232.10@73.534,77.339 73.534,74.421 78.232,69.723 78.232,57.785 79.248,56.769 P3.2@85.725,56.769 ; P3.2@85.284,56.328 ccw(c84.221,55.265) 84.221,56.769 ccw(c84.221,58.273) P3.2@85.284,57.21 ; P3.2@85.464,56.508 ccw(c84.834,55.878) 84.834,56.769 ccw(c84.834,57.66) P3.2@85.464,57.03
P32: AT89S52.12 P3.3 红外接头.3 | length 121.8
  Top Layer w0.254: P3.3@85.725,54.229 86.995,54.229 ; P3.3@86.017,54.003 cw(c86.477,53.647) 86.477,54.229 cw(c86.477,54.811) P3.3@86.017,54.455 ; P3.3@86.218,53.848 cw(c86.995,53.246) 86.995,54.229 ; P3.3@86.218,54.61 ccw(c86.995,55.212) 86.995,54.229 ; 92.146,59.38 ccw(c90.566,60.96) AT89S52.12@92.801,60.96 ; 92.508,59.742 cw(c93.576,58.675) AT89S52.12@93.576,60.185 ; 92.58,59.814 ccw(c91.434,60.96) AT89S52.12@93.055,60.96 ; 92.942,60.176 cw(c93.576,59.542) AT89S52.12@93.576,60.439 ; 93.013,60.247 ccw(c92.301,60.96) AT89S52.12@93.309,60.96 ; AT89S52.12@93.876,60.185 cw(c93.876,58.062) 95.377,59.563 ; AT89S52.12@93.876,60.439 cw(c93.876,58.929) 94.944,59.996 ; AT89S52.12@94.397,60.96 ccw(c95.405,60.96) 94.693,60.247 ; AT89S52.12@94.651,60.96 ccw(c96.272,60.96) 95.126,59.814 ; 130.188,37.846 ccw(c130.188,40.373) v1@131.975,38.586 ; 130.801,37.846 ccw(c130.801,39.76) v1@132.154,38.407 ; 131.414,37.846 ccw(c131.414,39.147) v1(132.334,38.227) 131.953,37.846 102.616,37.846 101.981,38.481 101.981,52.959 93.98,60.96 AT89S52.12@93.726,60.96 86.995,54.229 ; v1@149.682,32.029 ccw(c149.225,32.639) 149.987,32.639 ; v1(149.987,31.623) 149.987,32.639 ; v1@150.292,32.029 cw(c150.749,32.639) 149.987,32.639 ; 红外接头.3@154.245,34.611 ccw(c153.182,33.548) 153.182,35.052 ccw(c153.182,36.556) 红外接头.3@154.245,35.493 ; 红外接头.3@154.425,34.791 ccw(c153.795,34.161) 153.795,35.052 ccw(c153.795,35.943) 红外接头.3@154.425,35.313 ; 红外接头.3@154.686,35.052 152.4,35.052 149.987,32.639
  Bottom Layer w0.254: v1@132.029,37.821 cw(c131.572,37.211) 132.334,37.211 ; v1(132.334,38.227) 132.334,37.211 ; v1@132.639,37.821 ccw(c133.096,37.211) 132.334,37.211 ; v1@149.628,31.264 ccw(c148.761,30.397) 148.761,31.623 ccw(c148.761,32.849) v1@149.628,31.982 ; v1(149.987,31.623) 137.922,31.623 132.334,37.211
P33: 4.7k.2 18b20.2 24LC02.6 AT89S52.13 P3.4 | length 145.2
  Top Layer w0.254: P3.4@85.725,51.689 86.995,51.689 ; P3.4@86.017,51.463 cw(c86.477,51.107) 86.477,51.689 cw(c86.477,52.271) P3.4@86.017,51.915 ; P3.4@86.218,51.308 cw(c86.995,50.706) 86.995,51.689 ; P3.4@86.218,52.07 ccw(c86.995,52.672) 86.995,51.689 ; 92.146,56.84 ccw(c90.566,58.42) AT89S52.13@92.801,58.42 ; 92.508,57.202 cw(c93.576,56.135) AT89S52.13@93.576,57.645 ; 92.58,57.274 ccw(c91.434,58.42) AT89S52.13@93.055,58.42 ; 92.942,57.636 cw(c93.576,57.002) AT89S52.13@93.576,57.899 ; 93.013,57.707 ccw(c92.301,58.42) AT89S52.13@93.309,58.42 ; AT89S52.13@93.876,57.645 cw(c93.876,56.135) 94.944,57.202 ; AT89S52.13@93.876,57.899 cw(c93.876,57.002) 94.51,57.636 ; AT89S52.13@94.143,58.42 ccw(c95.151,58.42) 94.439,57.707 ; AT89S52.13@94.397,58.42 ccw(c96.018,58.42) 94.872,57.274 ; AT89S52.13@94.651,58.42 ccw(c96.886,58.42) 95.306,56.84 ; 132.04,36.83 ccw(c132.04,39.791) v1@134.134,37.697 ; 132.653,36.83 ccw(c132.653,39.178) v1@134.313,37.518 ; 133.267,36.83 ccw(c133.267,38.564) v1(134.493,37.338) 133.985,36.83 ; 133.88,36.83 ccw(c133.88,37.951) v1@134.673,37.158 ; v1@134.035,37.119 cw(c133.805,37.01) 133.985,36.83 ; v1@134.274,36.88 ccw(c134.165,36.65) 133.985,36.83 ; 86.995,51.689 AT89S52.13@93.726,58.42 100.838,51.308 100.838,38.227 102.235,36.83 133.985,36.83
  Bottom Layer w0.254: v1@134.493,36.83 cw(c134.493,36.523) 134.71,36.74 ; v1(134.493,37.338) 134.493,36.957 135.636,35.814 143.51,35.814 144.526,36.83 144.526,41.275 144.907,41.656 147.955,41.656 147.955,47.498 148.717,48.26 4.7k.2@149.098,48.26 149.098,52.451 147.447,54.102 147.447,56.002 24LC02.6@146.046,57.403 24LC02.6@146.432,57.403 ; v1@134.745,37.31 ccw(c135.877,37.183) 135.072,36.378 ; v1@134.998,37.282 ccw(c136.549,37.108) 135.445,36.005 ; 18b20.2@144.085,38.675 cw(c143.022,37.612) 144.526,37.612 cw(c146.03,37.612) 18b20.2@144.967,38.675 ; 18b20.2@144.085,39.557 ccw(c143.022,40.62) 144.526,40.62 ccw(c146.03,40.62) 18b20.2@144.967,39.557 ; 18b20.2@144.265,38.855 cw(c143.635,38.225) 144.526,38.225 cw(c145.417,38.225) 18b20.2@144.787,38.855 ; 18b20.2@144.265,39.377 ccw(c143.635,40.007) 144.526,40.007 ccw(c145.417,40.007) 18b20.2@144.787,39.377 ; 24LC02.6@146.224,56.92 cw(c146.224,56.185) 146.744,56.705 ; 24LC02.6@146.453,57.403 ccw(c147.434,57.403) 146.74,56.709 ; 24LC02.6@146.707,57.403 ccw(c148.301,57.403) 147.174,56.276 ; 148.086,47.629 cw(c148.781,46.933) 4.7k.2@149.009,47.889 ; 148.283,47.826 ccw(c147.85,48.26) 4.7k.2@148.463,48.26 ; 4.7k.2@148.649,48.709 ccw(c147.565,49.793) 149.098,49.793 ccw(c150.631,49.793) 4.7k.2@149.547,48.709 ; 4.7k.2@148.829,48.529 ccw(c148.178,49.18) 149.098,49.18 ccw(c150.018,49.18) 4.7k.2@149.367,48.529
P34: 24LC02.5 AT89S52.14 DS1302.5 P3.5 R50.1 | length 147.7
  Top Layer w0.254: P3.5@85.725,49.149 86.995,49.149 ; P3.5@86.017,48.923 cw(c86.477,48.567) 86.477,49.149 cw(c86.477,49.731) P3.5@86.017,49.375 ; P3.5@86.218,48.768 cw(c86.995,48.166) 86.995,49.149 ; P3.5@86.218,49.53 ccw(c86.995,50.132) 86.995,49.149 ; 92.146,54.3 ccw(c90.566,55.88) AT89S52.14@92.801,55.88 ; 92.508,54.662 cw(c93.576,53.595) AT89S52.14@93.576,55.105 ; 92.58,54.734 ccw(c91.434,55.88) AT89S52.14@93.055,55.88 ; 92.942,55.096 cw(c93.576,54.462) AT89S52.14@93.576,55.359 ; 93.013,55.167 ccw(c92.301,55.88) AT89S52.14@93.309,55.88 ; AT89S52.14@93.876,55.105 cw(c93.876,52.062) 96.028,54.213 ; AT89S52.14@93.876,55.359 cw(c93.876,52.929) 95.594,54.647 ; AT89S52.14@93.876,55.613 cw(c93.876,53.796) 95.16,55.081 ; AT89S52.14@93.876,55.867 cw(c93.876,54.663) 94.727,55.514 ; AT89S52.14@94.651,55.88 ccw(c95.352,55.88) 94.857,55.384 ; v1@140.103,43.583 ccw(c139.236,42.716) 139.236,43.942 ccw(c139.236,45.168) v1@140.103,44.301 ; v1(140.462,43.942) 137.668,43.942 135.636,41.91 135.636,36.322 135.382,36.068 101.092,36.068 99.949,37.211 99.949,50.292 94.361,55.88 AT89S52.14@93.726,55.88 86.995,49.149 ; 24LC02.5@145.711,54.516 cw(c144.945,53.725) 146.046,53.725 ; 24LC02.5@146.046,54.863 146.046,53.725 ; 24LC02.5@146.382,54.516 ccw(c147.147,53.725) 146.046,53.725 ; R50.1@153.729,48.709 ccw(c152.645,49.793) 154.178,49.793 ccw(c155.711,49.793) R50.1@154.627,48.709 ; R50.1@153.909,48.529 ccw(c153.258,49.18) 154.178,49.18 ccw(c155.098,49.18) R50.1@154.447,48.529 ; R50.1@154.178,48.26 154.178,52.959 ; 155.587,53.736 ccw(c154.459,54.863) DS1302.5@156.054,54.863 ; 156.016,54.165 cw(c156.536,53.645) DS1302.5@156.536,54.38 ; 156.02,54.169 ccw(c155.327,54.863) DS1302.5@156.308,54.863 ; DS1302.5@156.714,54.863 154.81,52.959 146.812,52.959 146.046,53.725
  Bottom Layer w0.254: v1(140.462,43.942) 143.51,43.942 v1(143.637,44.069) 143.637,52.454 24LC02.5@146.046,54.863 ; v1@140.821,43.583 cw(c141.688,42.716) 141.688,43.942 cw(c141.688,45.168) v1@140.821,44.301 ; 142.104,43.942 ccw(c142.104,45.602) 143.278,44.428 ccw(c142.411,45.295) 143.637,45.295 ccw(c144.863,45.295) v1@143.996,44.428 ; v1@143.278,43.71 ccw(c142.717,43.149) 142.717,43.942 ccw(c142.717,44.989) v1@143.457,44.249 ; 144.919,53.736 ccw(c143.791,54.863) 24LC02.5@145.386,54.863 ; 145.348,54.165 cw(c145.868,53.645) 24LC02.5@145.868,54.38 ; 145.352,54.169 ccw(c144.659,54.863) 24LC02.5@145.64,54.863